# EAGLE board UCirKitBreadboardTop (EAGLE 7.3.0), part 1 of 2
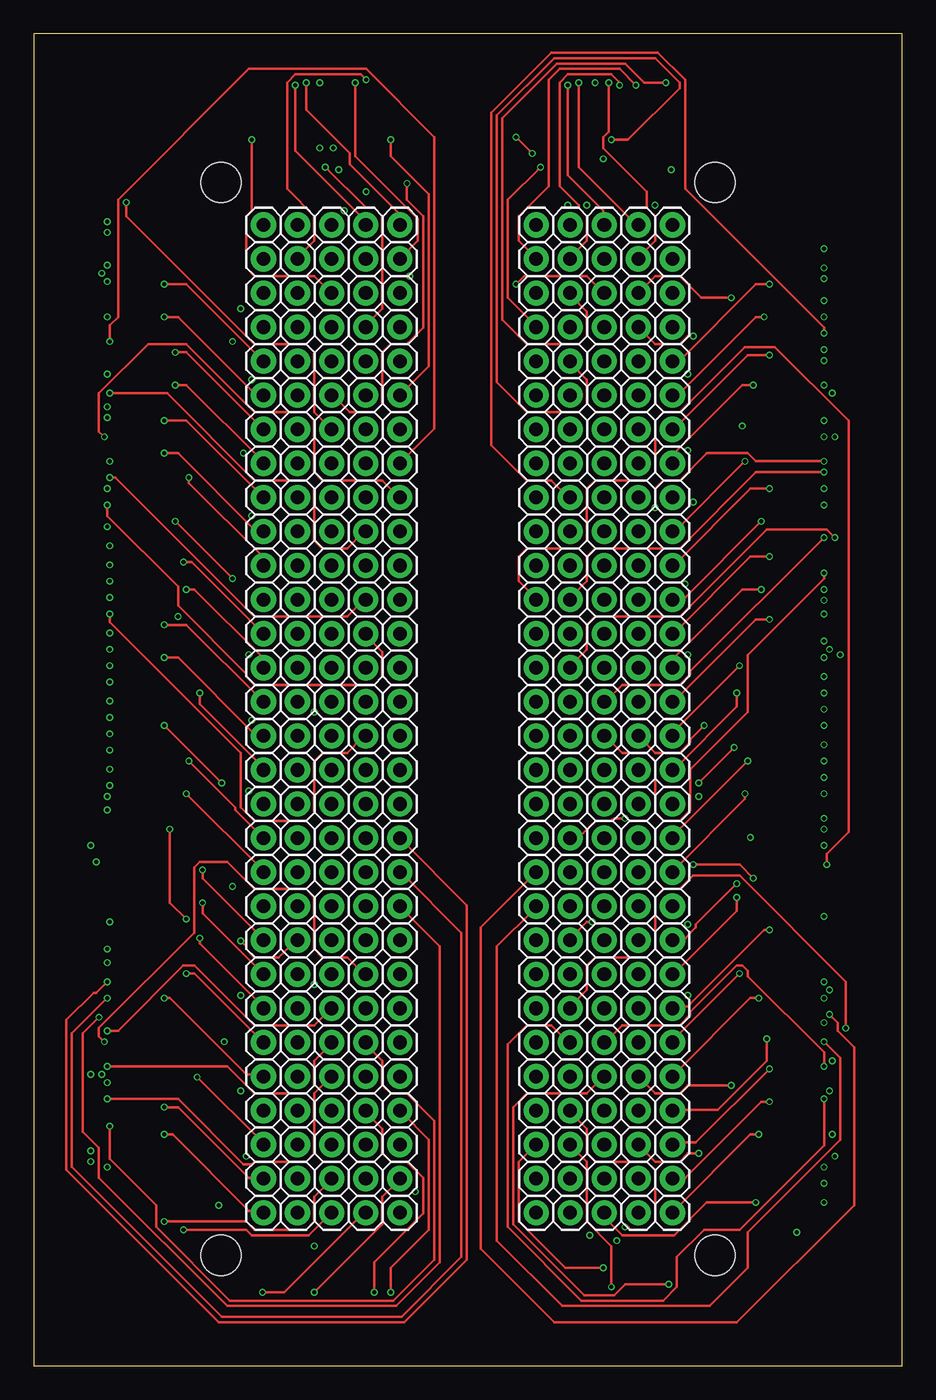
[diagram p0: board, top side]
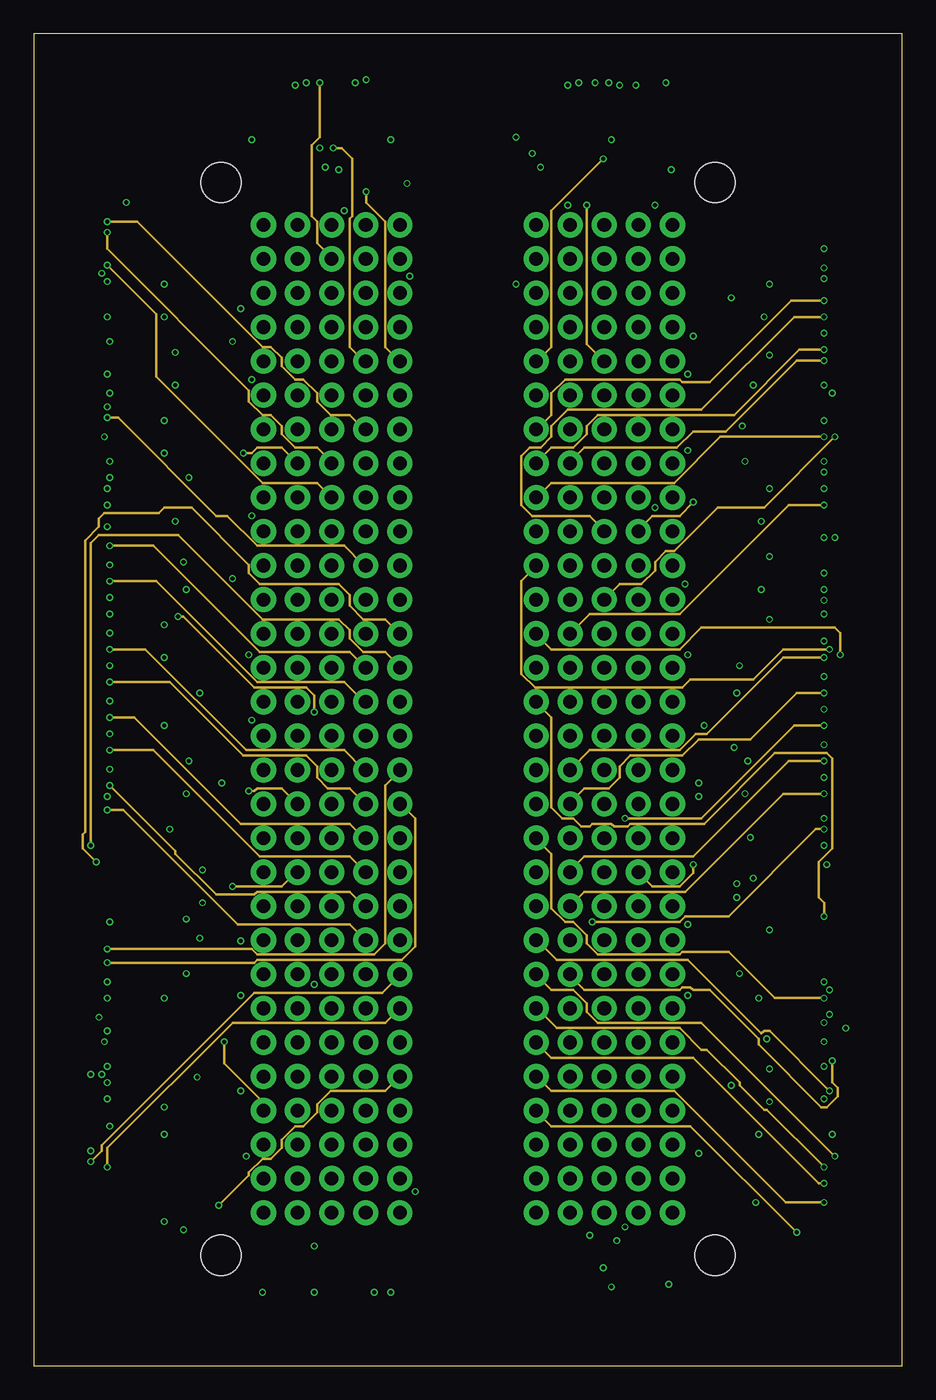
[diagram p1: board, inner layer Route2]
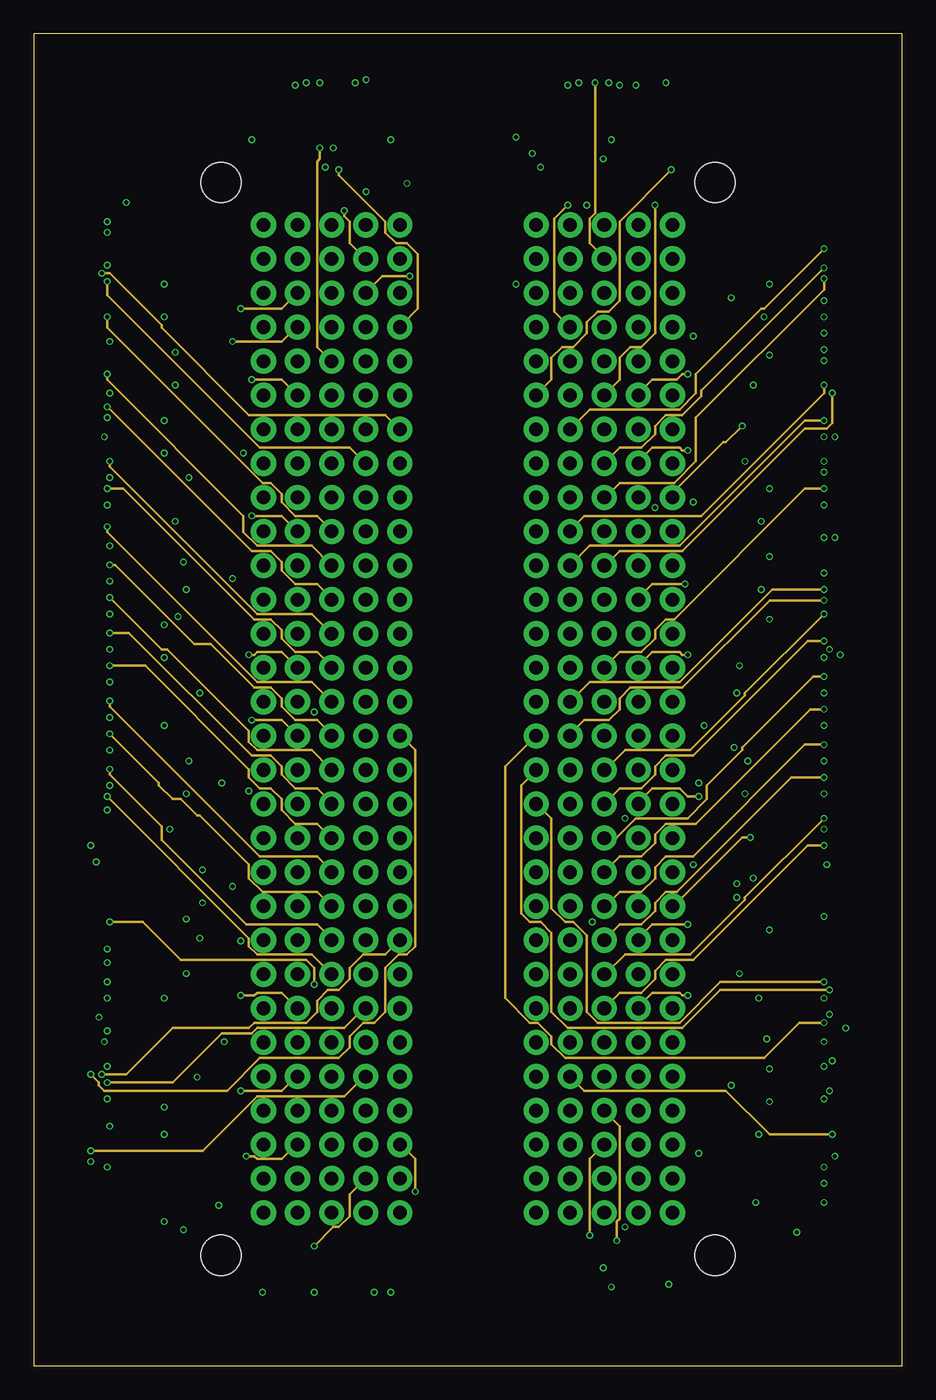
[diagram p2: board, inner layer Route15]
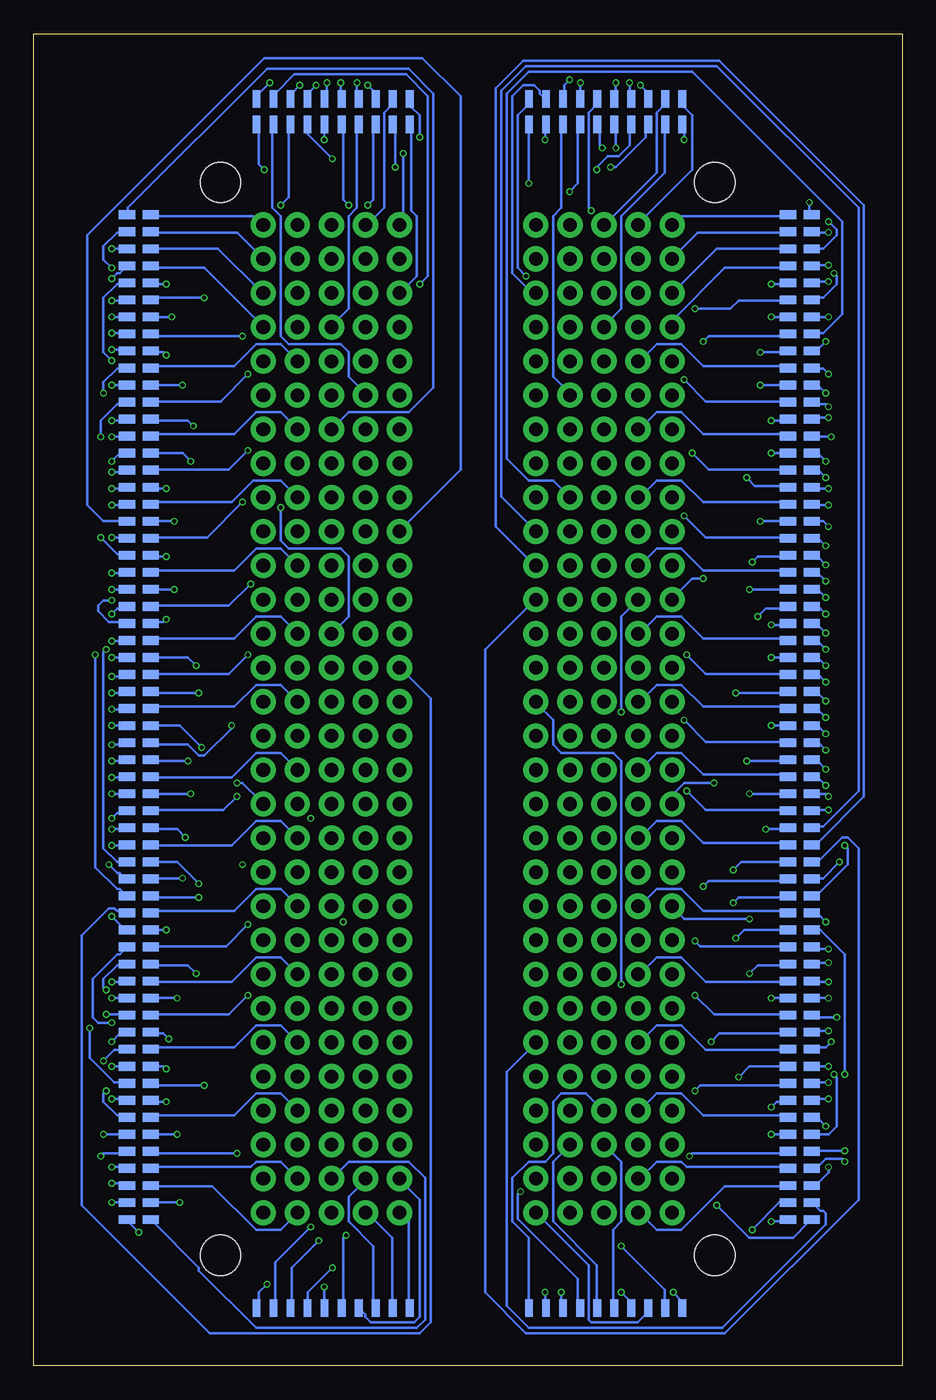
[diagram p3: board, bottom side, seen from below]

Size 64.75 x 99.36 mm. Coordinates in mm from the lower left corner, seen from the top.
Outline: 0,0 64.75,0 64.75,99.36 0,99.36 0,0
Copper layers (1*2*15*16): Top 0.035mm / dielectric 0.48mm / Route2 0.035mm / dielectric 0.48mm / Route15 0.035mm / dielectric 0.48mm / Bottom 0.035mm
Design rules "SeeedStudio_4layer_DRU_no_angle_20140221 *": minimum track width 8mil, minimum drill 12mil, track to track 8mil, track to pad 8mil, pad to pad 8mil, via to via 8mil, smd to smd 0mil, copper to edge 10mil, drill to drill 8mil, minimum pad ring 6mil, minimum via ring 4mil, stop-mask expansion 4mil, vias tented up to drill 100mil, thermal gap 10mil
Holes 3 mm at 13.97,88.27 50.8,88.27 13.97,8.26 50.8,8.26

## Footprints (pad centres in the part's own frame; a part is rotated, then mirrored left to right if it is on the bottom)
1X01_WITHOUT_TEXT = drill 1.016 pad 1.88: 1 0,0
1X01_SMD_1.27X0.635MM_NO_SILK = smd 1.27 x 0.635: P$2 0,0

## Placement (x,y rotation side)
JP1  [1X01_WITHOUT_TEXT]  17.14,85.09 0 top
JP2  [1X01_WITHOUT_TEXT]  19.68,85.09 0 top
JP3  [1X01_WITHOUT_TEXT]  22.23,85.09 0 top
JP4  [1X01_WITHOUT_TEXT]  24.77,85.09 0 top
JP5  [1X01_WITHOUT_TEXT]  27.3,85.09 0 top
JP6  [1X01_WITHOUT_TEXT]  37.47,85.09 0 top
JP7  [1X01_WITHOUT_TEXT]  40.01,85.09 0 top
JP8  [1X01_WITHOUT_TEXT]  42.55,85.09 0 top
JP9  [1X01_WITHOUT_TEXT]  45.09,85.09 0 top
JP10  [1X01_WITHOUT_TEXT]  47.62,85.09 0 top
JP11  [1X01_WITHOUT_TEXT]  17.14,82.55 0 top
JP12  [1X01_WITHOUT_TEXT]  19.68,82.55 0 top
JP13  [1X01_WITHOUT_TEXT]  22.23,82.55 0 top
JP14  [1X01_WITHOUT_TEXT]  24.77,82.55 0 top
JP15  [1X01_WITHOUT_TEXT]  27.3,82.55 0 top
JP16  [1X01_WITHOUT_TEXT]  37.47,82.55 0 top
JP17  [1X01_WITHOUT_TEXT]  40.01,82.55 0 top
JP18  [1X01_WITHOUT_TEXT]  42.55,82.55 0 top
JP19  [1X01_WITHOUT_TEXT]  45.09,82.55 0 top
JP20  [1X01_WITHOUT_TEXT]  47.62,82.55 0 top
JP21  [1X01_WITHOUT_TEXT]  17.14,80.01 0 top
JP22  [1X01_WITHOUT_TEXT]  19.68,80.01 0 top
JP23  [1X01_WITHOUT_TEXT]  22.23,80.01 0 top
JP24  [1X01_WITHOUT_TEXT]  24.77,80.01 0 top
JP25  [1X01_WITHOUT_TEXT]  27.3,80.01 0 top
JP26  [1X01_WITHOUT_TEXT]  37.47,80.01 0 top
JP27  [1X01_WITHOUT_TEXT]  40.01,80.01 0 top
JP28  [1X01_WITHOUT_TEXT]  42.55,80.01 0 top
JP29  [1X01_WITHOUT_TEXT]  45.09,80.01 0 top
JP30  [1X01_WITHOUT_TEXT]  47.62,80.01 0 top
JP31  [1X01_WITHOUT_TEXT]  17.14,77.47 0 top
JP32  [1X01_WITHOUT_TEXT]  19.68,77.47 0 top
JP33  [1X01_WITHOUT_TEXT]  22.23,77.47 0 top
JP34  [1X01_WITHOUT_TEXT]  24.77,77.47 0 top
JP35  [1X01_WITHOUT_TEXT]  27.3,77.47 0 top
JP36  [1X01_WITHOUT_TEXT]  37.47,77.47 0 top
JP37  [1X01_WITHOUT_TEXT]  40.01,77.47 0 top
JP38  [1X01_WITHOUT_TEXT]  42.55,77.47 0 top
JP39  [1X01_WITHOUT_TEXT]  45.09,77.47 0 top
JP40  [1X01_WITHOUT_TEXT]  47.62,77.47 0 top
JP41  [1X01_WITHOUT_TEXT]  17.14,74.93 0 top
JP42  [1X01_WITHOUT_TEXT]  19.68,74.93 0 top
JP43  [1X01_WITHOUT_TEXT]  22.23,74.93 0 top
JP44  [1X01_WITHOUT_TEXT]  24.77,74.93 0 top
JP45  [1X01_WITHOUT_TEXT]  27.3,74.93 0 top
JP46  [1X01_WITHOUT_TEXT]  37.47,74.93 0 top
JP47  [1X01_WITHOUT_TEXT]  40.01,74.93 0 top
JP48  [1X01_WITHOUT_TEXT]  42.55,74.93 0 top
JP49  [1X01_WITHOUT_TEXT]  45.09,74.93 0 top
JP50  [1X01_WITHOUT_TEXT]  47.62,74.93 0 top
JP51  [1X01_WITHOUT_TEXT]  17.14,72.39 0 top
JP52  [1X01_WITHOUT_TEXT]  19.68,72.39 0 top
JP53  [1X01_WITHOUT_TEXT]  22.23,72.39 0 top
JP54  [1X01_WITHOUT_TEXT]  24.77,72.39 0 top
JP55  [1X01_WITHOUT_TEXT]  27.3,72.39 0 top
JP56  [1X01_WITHOUT_TEXT]  37.47,72.39 0 top
JP57  [1X01_WITHOUT_TEXT]  40.01,72.39 0 top
JP58  [1X01_WITHOUT_TEXT]  42.55,72.39 0 top
JP59  [1X01_WITHOUT_TEXT]  45.09,72.39 0 top
JP60  [1X01_WITHOUT_TEXT]  47.62,72.39 0 top
JP61  [1X01_WITHOUT_TEXT]  17.14,69.85 0 top
JP62  [1X01_WITHOUT_TEXT]  19.68,69.85 0 top
JP63  [1X01_WITHOUT_TEXT]  22.23,69.85 0 top
JP64  [1X01_WITHOUT_TEXT]  24.77,69.85 0 top
JP65  [1X01_WITHOUT_TEXT]  27.3,69.85 0 top
JP66  [1X01_WITHOUT_TEXT]  37.47,69.85 0 top
JP67  [1X01_WITHOUT_TEXT]  40.01,69.85 0 top
JP68  [1X01_WITHOUT_TEXT]  42.55,69.85 0 top
JP69  [1X01_WITHOUT_TEXT]  45.09,69.85 0 top
JP70  [1X01_WITHOUT_TEXT]  47.62,69.85 0 top
JP71  [1X01_WITHOUT_TEXT]  17.14,67.31 0 top
JP72  [1X01_WITHOUT_TEXT]  19.68,67.31 0 top
JP73  [1X01_WITHOUT_TEXT]  22.23,67.31 0 top
JP74  [1X01_WITHOUT_TEXT]  24.77,67.31 0 top
JP75  [1X01_WITHOUT_TEXT]  27.3,67.31 0 top
JP76  [1X01_WITHOUT_TEXT]  37.47,67.31 0 top
JP77  [1X01_WITHOUT_TEXT]  40.01,67.31 0 top
JP78  [1X01_WITHOUT_TEXT]  42.55,67.31 0 top
JP79  [1X01_WITHOUT_TEXT]  45.09,67.31 0 top
JP80  [1X01_WITHOUT_TEXT]  47.62,67.31 0 top
JP81  [1X01_WITHOUT_TEXT]  17.14,64.77 0 top
JP82  [1X01_WITHOUT_TEXT]  19.68,64.77 0 top
JP83  [1X01_WITHOUT_TEXT]  22.23,64.77 0 top
JP84  [1X01_WITHOUT_TEXT]  24.77,64.77 0 top
JP85  [1X01_WITHOUT_TEXT]  27.3,64.77 0 top
JP86  [1X01_WITHOUT_TEXT]  37.47,64.77 0 top
JP87  [1X01_WITHOUT_TEXT]  40.01,64.77 0 top
JP88  [1X01_WITHOUT_TEXT]  42.55,64.77 0 top
JP89  [1X01_WITHOUT_TEXT]  45.09,64.77 0 top
JP90  [1X01_WITHOUT_TEXT]  47.62,64.77 0 top
JP91  [1X01_WITHOUT_TEXT]  17.14,62.23 0 top
JP92  [1X01_WITHOUT_TEXT]  19.68,62.23 0 top
JP93  [1X01_WITHOUT_TEXT]  22.23,62.23 0 top
JP94  [1X01_WITHOUT_TEXT]  24.77,62.23 0 top
JP95  [1X01_WITHOUT_TEXT]  27.3,62.23 0 top
JP96  [1X01_WITHOUT_TEXT]  37.47,62.23 0 top
JP97  [1X01_WITHOUT_TEXT]  40.01,62.23 0 top
JP98  [1X01_WITHOUT_TEXT]  42.55,62.23 0 top
JP99  [1X01_WITHOUT_TEXT]  45.09,62.23 0 top
JP100  [1X01_WITHOUT_TEXT]  47.62,62.23 0 top
JP101  [1X01_WITHOUT_TEXT]  17.14,59.69 0 top
JP102  [1X01_WITHOUT_TEXT]  19.68,59.69 0 top
JP103  [1X01_WITHOUT_TEXT]  22.23,59.69 0 top
JP104  [1X01_WITHOUT_TEXT]  24.77,59.69 0 top
JP105  [1X01_WITHOUT_TEXT]  27.3,59.69 0 top
JP106  [1X01_WITHOUT_TEXT]  37.47,59.69 0 top
JP107  [1X01_WITHOUT_TEXT]  40.01,59.69 0 top
JP108  [1X01_WITHOUT_TEXT]  42.55,59.69 0 top
JP109  [1X01_WITHOUT_TEXT]  45.09,59.69 0 top
JP110  [1X01_WITHOUT_TEXT]  47.62,59.69 0 top
JP111  [1X01_WITHOUT_TEXT]  17.14,57.15 0 top
JP112  [1X01_WITHOUT_TEXT]  19.68,57.15 0 top
JP113  [1X01_WITHOUT_TEXT]  22.23,57.15 0 top
JP114  [1X01_WITHOUT_TEXT]  24.77,57.15 0 top
JP115  [1X01_WITHOUT_TEXT]  27.3,57.15 0 top
JP116  [1X01_WITHOUT_TEXT]  37.47,57.15 0 top
JP117  [1X01_WITHOUT_TEXT]  40.01,57.15 0 top
JP118  [1X01_WITHOUT_TEXT]  42.55,57.15 0 top
JP119  [1X01_WITHOUT_TEXT]  45.09,57.15 0 top
JP120  [1X01_WITHOUT_TEXT]  47.62,57.15 0 top
JP121  [1X01_WITHOUT_TEXT]  17.14,54.61 0 top
JP122  [1X01_WITHOUT_TEXT]  19.68,54.61 0 top
JP123  [1X01_WITHOUT_TEXT]  22.23,54.61 0 top
JP124  [1X01_WITHOUT_TEXT]  24.77,54.61 0 top
JP125  [1X01_WITHOUT_TEXT]  27.3,54.61 0 top
JP126  [1X01_WITHOUT_TEXT]  37.47,54.61 0 top
JP127  [1X01_WITHOUT_TEXT]  40.01,54.61 0 top
JP128  [1X01_WITHOUT_TEXT]  42.55,54.61 0 top
JP129  [1X01_WITHOUT_TEXT]  45.09,54.61 0 top
JP130  [1X01_WITHOUT_TEXT]  47.62,54.61 0 top
JP131  [1X01_WITHOUT_TEXT]  17.14,52.07 0 top
JP132  [1X01_WITHOUT_TEXT]  19.68,52.07 0 top
JP133  [1X01_WITHOUT_TEXT]  22.23,52.07 0 top
JP134  [1X01_WITHOUT_TEXT]  24.77,52.07 0 top
JP135  [1X01_WITHOUT_TEXT]  27.3,52.07 0 top
JP136  [1X01_WITHOUT_TEXT]  37.47,52.07 0 top
JP137  [1X01_WITHOUT_TEXT]  40.01,52.07 0 top
JP138  [1X01_WITHOUT_TEXT]  42.55,52.07 0 top
JP139  [1X01_WITHOUT_TEXT]  45.09,52.07 0 top
JP140  [1X01_WITHOUT_TEXT]  47.62,52.07 0 top
JP141  [1X01_WITHOUT_TEXT]  17.14,49.53 0 top
JP142  [1X01_WITHOUT_TEXT]  19.68,49.53 0 top
JP143  [1X01_WITHOUT_TEXT]  22.23,49.53 0 top
JP144  [1X01_WITHOUT_TEXT]  24.77,49.53 0 top
JP145  [1X01_WITHOUT_TEXT]  27.3,49.53 0 top
JP146  [1X01_WITHOUT_TEXT]  37.47,49.53 0 top
JP147  [1X01_WITHOUT_TEXT]  40.01,49.53 0 top
JP148  [1X01_WITHOUT_TEXT]  42.55,49.53 0 top
JP149  [1X01_WITHOUT_TEXT]  45.09,49.53 0 top
JP150  [1X01_WITHOUT_TEXT]  47.62,49.53 0 top
JP151  [1X01_WITHOUT_TEXT]  17.14,46.99 0 top
JP152  [1X01_WITHOUT_TEXT]  19.68,46.99 0 top
JP153  [1X01_WITHOUT_TEXT]  22.23,46.99 0 top
JP154  [1X01_WITHOUT_TEXT]  24.77,46.99 0 top
JP155  [1X01_WITHOUT_TEXT]  27.3,46.99 0 top
JP156  [1X01_WITHOUT_TEXT]  37.47,46.99 0 top
JP157  [1X01_WITHOUT_TEXT]  40.01,46.99 0 top
JP158  [1X01_WITHOUT_TEXT]  42.55,46.99 0 top
JP159  [1X01_WITHOUT_TEXT]  45.09,46.99 0 top
JP160  [1X01_WITHOUT_TEXT]  47.62,46.99 0 top
JP161  [1X01_WITHOUT_TEXT]  17.14,44.45 0 top
JP162  [1X01_WITHOUT_TEXT]  19.68,44.45 0 top
JP163  [1X01_WITHOUT_TEXT]  22.23,44.45 0 top
JP164  [1X01_WITHOUT_TEXT]  24.77,44.45 0 top
JP165  [1X01_WITHOUT_TEXT]  27.3,44.45 0 top
JP166  [1X01_WITHOUT_TEXT]  37.47,44.45 0 top
JP167  [1X01_WITHOUT_TEXT]  40.01,44.45 0 top
JP168  [1X01_WITHOUT_TEXT]  42.55,44.45 0 top
JP169  [1X01_WITHOUT_TEXT]  45.09,44.45 0 top
JP170  [1X01_WITHOUT_TEXT]  47.62,44.45 0 top
JP171  [1X01_WITHOUT_TEXT]  17.14,41.91 0 top
JP172  [1X01_WITHOUT_TEXT]  19.68,41.91 0 top
JP173  [1X01_WITHOUT_TEXT]  22.23,41.91 0 top
JP174  [1X01_WITHOUT_TEXT]  24.77,41.91 0 top
JP175  [1X01_WITHOUT_TEXT]  27.3,41.91 0 top
JP176  [1X01_WITHOUT_TEXT]  37.47,41.91 0 top
JP177  [1X01_WITHOUT_TEXT]  40.01,41.91 0 top
JP178  [1X01_WITHOUT_TEXT]  42.55,41.91 0 top
JP179  [1X01_WITHOUT_TEXT]  45.09,41.91 0 top
JP180  [1X01_WITHOUT_TEXT]  47.62,41.91 0 top
JP181  [1X01_WITHOUT_TEXT]  17.14,39.37 0 top
JP182  [1X01_WITHOUT_TEXT]  19.68,39.37 0 top
JP183  [1X01_WITHOUT_TEXT]  22.23,39.37 0 top
JP184  [1X01_WITHOUT_TEXT]  24.77,39.37 0 top
JP185  [1X01_WITHOUT_TEXT]  27.3,39.37 0 top
JP186  [1X01_WITHOUT_TEXT]  37.47,39.37 0 top
JP187  [1X01_WITHOUT_TEXT]  40.01,39.37 0 top
JP188  [1X01_WITHOUT_TEXT]  42.55,39.37 0 top
JP189  [1X01_WITHOUT_TEXT]  45.09,39.37 0 top
JP190  [1X01_WITHOUT_TEXT]  47.62,39.37 0 top
JP191  [1X01_WITHOUT_TEXT]  17.14,36.83 0 top
JP192  [1X01_WITHOUT_TEXT]  19.68,36.83 0 top
JP193  [1X01_WITHOUT_TEXT]  22.23,36.83 0 top
JP194  [1X01_WITHOUT_TEXT]  24.77,36.83 0 top
JP195  [1X01_WITHOUT_TEXT]  27.3,36.83 0 top
JP196  [1X01_WITHOUT_TEXT]  37.47,36.83 0 top
JP197  [1X01_WITHOUT_TEXT]  40.01,36.83 0 top
JP198  [1X01_WITHOUT_TEXT]  42.55,36.83 0 top
JP199  [1X01_WITHOUT_TEXT]  45.09,36.83 0 top
JP200  [1X01_WITHOUT_TEXT]  47.62,36.83 0 top
JP201  [1X01_WITHOUT_TEXT]  17.14,34.29 0 top
JP202  [1X01_WITHOUT_TEXT]  19.68,34.29 0 top
JP203  [1X01_WITHOUT_TEXT]  22.23,34.29 0 top
JP204  [1X01_WITHOUT_TEXT]  24.77,34.29 0 top
JP205  [1X01_WITHOUT_TEXT]  27.3,34.29 0 top
JP206  [1X01_WITHOUT_TEXT]  37.47,34.29 0 top
JP207  [1X01_WITHOUT_TEXT]  40.01,34.29 0 top
JP208  [1X01_WITHOUT_TEXT]  42.55,34.29 0 top
JP209  [1X01_WITHOUT_TEXT]  45.09,34.29 0 top
JP210  [1X01_WITHOUT_TEXT]  47.62,34.29 0 top
JP211  [1X01_WITHOUT_TEXT]  17.14,31.75 0 top
JP212  [1X01_WITHOUT_TEXT]  19.68,31.75 0 top
JP213  [1X01_WITHOUT_TEXT]  22.23,31.75 0 top
JP214  [1X01_WITHOUT_TEXT]  24.77,31.75 0 top
JP215  [1X01_WITHOUT_TEXT]  27.3,31.75 0 top
JP216  [1X01_WITHOUT_TEXT]  37.47,31.75 0 top
JP217  [1X01_WITHOUT_TEXT]  40.01,31.75 0 top
JP218  [1X01_WITHOUT_TEXT]  42.55,31.75 0 top
JP219  [1X01_WITHOUT_TEXT]  45.09,31.75 0 top
JP220  [1X01_WITHOUT_TEXT]  47.62,31.75 0 top
JP221  [1X01_WITHOUT_TEXT]  17.14,29.21 0 top
JP222  [1X01_WITHOUT_TEXT]  19.68,29.21 0 top
JP223  [1X01_WITHOUT_TEXT]  22.23,29.21 0 top
JP224  [1X01_WITHOUT_TEXT]  24.77,29.21 0 top
JP225  [1X01_WITHOUT_TEXT]  27.3,29.21 0 top
JP226  [1X01_WITHOUT_TEXT]  37.47,29.21 0 top
JP227  [1X01_WITHOUT_TEXT]  40.01,29.21 0 top
JP228  [1X01_WITHOUT_TEXT]  42.55,29.21 0 top
JP229  [1X01_WITHOUT_TEXT]  45.09,29.21 0 top
JP230  [1X01_WITHOUT_TEXT]  47.62,29.21 0 top
JP231  [1X01_WITHOUT_TEXT]  17.14,26.67 0 top
JP232  [1X01_WITHOUT_TEXT]  19.68,26.67 0 top
JP233  [1X01_WITHOUT_TEXT]  22.23,26.67 0 top
JP234  [1X01_WITHOUT_TEXT]  24.77,26.67 0 top
JP235  [1X01_WITHOUT_TEXT]  27.3,26.67 0 top
JP236  [1X01_WITHOUT_TEXT]  37.47,26.67 0 top
JP237  [1X01_WITHOUT_TEXT]  40.01,26.67 0 top
JP238  [1X01_WITHOUT_TEXT]  42.55,26.67 0 top
JP239  [1X01_WITHOUT_TEXT]  45.09,26.67 0 top
JP240  [1X01_WITHOUT_TEXT]  47.62,26.67 0 top
JP241  [1X01_WITHOUT_TEXT]  17.14,24.13 0 top
JP242  [1X01_WITHOUT_TEXT]  19.68,24.13 0 top
JP243  [1X01_WITHOUT_TEXT]  22.23,24.13 0 top
JP244  [1X01_WITHOUT_TEXT]  24.77,24.13 0 top
JP245  [1X01_WITHOUT_TEXT]  27.3,24.13 0 top
JP246  [1X01_WITHOUT_TEXT]  37.47,24.13 0 top
JP247  [1X01_WITHOUT_TEXT]  40.01,24.13 0 top
JP248  [1X01_WITHOUT_TEXT]  42.55,24.13 0 top
JP249  [1X01_WITHOUT_TEXT]  45.09,24.13 0 top
JP250  [1X01_WITHOUT_TEXT]  47.62,24.13 0 top
JP251  [1X01_WITHOUT_TEXT]  17.14,21.59 0 top
JP252  [1X01_WITHOUT_TEXT]  19.68,21.59 0 top
JP253  [1X01_WITHOUT_TEXT]  22.23,21.59 0 top
JP254  [1X01_WITHOUT_TEXT]  24.77,21.59 0 top
JP255  [1X01_WITHOUT_TEXT]  27.3,21.59 0 top
JP256  [1X01_WITHOUT_TEXT]  37.47,21.59 0 top
JP257  [1X01_WITHOUT_TEXT]  40.01,21.59 0 top
JP258  [1X01_WITHOUT_TEXT]  42.55,21.59 0 top
JP259  [1X01_WITHOUT_TEXT]  45.09,21.59 0 top
JP260  [1X01_WITHOUT_TEXT]  47.62,21.59 0 top
JP261  [1X01_WITHOUT_TEXT]  17.14,19.05 0 top
JP262  [1X01_WITHOUT_TEXT]  19.68,19.05 0 top
JP263  [1X01_WITHOUT_TEXT]  22.23,19.05 0 top
JP264  [1X01_WITHOUT_TEXT]  24.77,19.05 0 top
JP265  [1X01_WITHOUT_TEXT]  27.3,19.05 0 top
JP266  [1X01_WITHOUT_TEXT]  37.47,19.05 0 top
JP267  [1X01_WITHOUT_TEXT]  40.01,19.05 0 top
JP268  [1X01_WITHOUT_TEXT]  42.55,19.05 0 top
JP269  [1X01_WITHOUT_TEXT]  45.09,19.05 0 top
JP270  [1X01_WITHOUT_TEXT]  47.62,19.05 0 top
JP271  [1X01_WITHOUT_TEXT]  17.14,16.51 0 top
JP272  [1X01_WITHOUT_TEXT]  19.68,16.51 0 top
JP273  [1X01_WITHOUT_TEXT]  22.23,16.51 0 top
JP274  [1X01_WITHOUT_TEXT]  24.77,16.51 0 top
JP275  [1X01_WITHOUT_TEXT]  27.3,16.51 0 top
JP276  [1X01_WITHOUT_TEXT]  37.47,16.51 0 top
JP277  [1X01_WITHOUT_TEXT]  40.01,16.51 0 top
JP278  [1X01_WITHOUT_TEXT]  42.55,16.51 0 top
JP279  [1X01_WITHOUT_TEXT]  45.09,16.51 0 top
JP280  [1X01_WITHOUT_TEXT]  47.62,16.51 0 top
JP281  [1X01_WITHOUT_TEXT]  17.14,13.97 0 top
JP282  [1X01_WITHOUT_TEXT]  19.68,13.97 0 top
JP283  [1X01_WITHOUT_TEXT]  22.23,13.97 0 top
JP284  [1X01_WITHOUT_TEXT]  24.77,13.97 0 top
JP285  [1X01_WITHOUT_TEXT]  27.3,13.97 0 top
JP286  [1X01_WITHOUT_TEXT]  37.47,13.97 0 top
JP287  [1X01_WITHOUT_TEXT]  40.01,13.97 0 top
JP288  [1X01_WITHOUT_TEXT]  42.55,13.97 0 top
JP289  [1X01_WITHOUT_TEXT]  45.09,13.97 0 top
JP290  [1X01_WITHOUT_TEXT]  47.62,13.97 0 top
JP291  [1X01_WITHOUT_TEXT]  17.14,11.43 0 top
JP292  [1X01_WITHOUT_TEXT]  19.68,11.43 0 top
JP293  [1X01_WITHOUT_TEXT]  22.23,11.43 0 top
JP294  [1X01_WITHOUT_TEXT]  24.77,11.43 0 top
JP295  [1X01_WITHOUT_TEXT]  27.3,11.43 0 top
JP296  [1X01_WITHOUT_TEXT]  37.47,11.43 0 top
JP297  [1X01_WITHOUT_TEXT]  40.01,11.43 0 top
JP298  [1X01_WITHOUT_TEXT]  42.55,11.43 0 top
JP299  [1X01_WITHOUT_TEXT]  45.09,11.43 0 top
JP300  [1X01_WITHOUT_TEXT]  47.62,11.43 0 top
JP901  [1X01_SMD_1.27X0.635MM_NO_SILK]  6.73,85.85 0 bottom
JP902  [1X01_SMD_1.27X0.635MM_NO_SILK]  6.73,84.58 0 bottom
JP903  [1X01_SMD_1.27X0.635MM_NO_SILK]  6.73,83.31 0 bottom
JP904  [1X01_SMD_1.27X0.635MM_NO_SILK]  6.73,82.04 0 bottom
JP905  [1X01_SMD_1.27X0.635MM_NO_SILK]  6.73,80.77 0 bottom
JP906  [1X01_SMD_1.27X0.635MM_NO_SILK]  6.73,79.5 0 bottom
JP907  [1X01_SMD_1.27X0.635MM_NO_SILK]  6.73,78.23 0 bottom
JP908  [1X01_SMD_1.27X0.635MM_NO_SILK]  6.73,76.96 0 bottom
JP909  [1X01_SMD_1.27X0.635MM_NO_SILK]  6.73,75.69 0 bottom
JP910  [1X01_SMD_1.27X0.635MM_NO_SILK]  6.73,74.42 0 bottom
JP911  [1X01_SMD_1.27X0.635MM_NO_SILK]  6.73,73.15 0 bottom
JP912  [1X01_SMD_1.27X0.635MM_NO_SILK]  6.73,71.88 0 bottom
JP913  [1X01_SMD_1.27X0.635MM_NO_SILK]  6.73,70.61 0 bottom
JP914  [1X01_SMD_1.27X0.635MM_NO_SILK]  6.73,69.34 0 bottom
JP915  [1X01_SMD_1.27X0.635MM_NO_SILK]  6.73,68.07 0 bottom
JP916  [1X01_SMD_1.27X0.635MM_NO_SILK]  6.73,66.8 0 bottom
JP917  [1X01_SMD_1.27X0.635MM_NO_SILK]  6.73,65.53 0 bottom
JP918  [1X01_SMD_1.27X0.635MM_NO_SILK]  6.73,64.26 0 bottom
JP919  [1X01_SMD_1.27X0.635MM_NO_SILK]  6.73,62.99 0 bottom
JP920  [1X01_SMD_1.27X0.635MM_NO_SILK]  6.73,61.72 0 bottom
JP921  [1X01_SMD_1.27X0.635MM_NO_SILK]  6.73,60.45 0 bottom
JP922  [1X01_SMD_1.27X0.635MM_NO_SILK]  6.73,59.18 0 bottom
JP923  [1X01_SMD_1.27X0.635MM_NO_SILK]  6.73,57.91 0 bottom
JP924  [1X01_SMD_1.27X0.635MM_NO_SILK]  6.73,56.64 0 bottom
JP925  [1X01_SMD_1.27X0.635MM_NO_SILK]  6.73,55.37 0 bottom
JP926  [1X01_SMD_1.27X0.635MM_NO_SILK]  6.73,54.1 0 bottom
JP927  [1X01_SMD_1.27X0.635MM_NO_SILK]  6.73,52.83 0 bottom
JP928  [1X01_SMD_1.27X0.635MM_NO_SILK]  6.73,51.56 0 bottom
JP929  [1X01_SMD_1.27X0.635MM_NO_SILK]  6.73,50.29 0 bottom
JP930  [1X01_SMD_1.27X0.635MM_NO_SILK]  6.73,49.02 0 bottom
JP931  [1X01_SMD_1.27X0.635MM_NO_SILK]  6.73,47.75 0 bottom
JP932  [1X01_SMD_1.27X0.635MM_NO_SILK]  6.73,46.48 0 bottom
JP933  [1X01_SMD_1.27X0.635MM_NO_SILK]  6.73,45.21 0 bottom
JP934  [1X01_SMD_1.27X0.635MM_NO_SILK]  6.73,43.94 0 bottom
JP935  [1X01_SMD_1.27X0.635MM_NO_SILK]  6.73,42.67 0 bottom
JP936  [1X01_SMD_1.27X0.635MM_NO_SILK]  6.73,41.4 0 bottom
JP937  [1X01_SMD_1.27X0.635MM_NO_SILK]  6.73,24.89 0 bottom
JP938  [1X01_SMD_1.27X0.635MM_NO_SILK]  6.73,23.62 0 bottom
JP939  [1X01_SMD_1.27X0.635MM_NO_SILK]  6.73,22.35 0 bottom
JP940  [1X01_SMD_1.27X0.635MM_NO_SILK]  6.73,21.08 0 bottom
JP941  [1X01_SMD_1.27X0.635MM_NO_SILK]  6.73,19.81 0 bottom
JP942  [1X01_SMD_1.27X0.635MM_NO_SILK]  6.73,18.54 0 bottom
JP943  [1X01_SMD_1.27X0.635MM_NO_SILK]  6.73,17.27 0 bottom
JP944  [1X01_SMD_1.27X0.635MM_NO_SILK]  6.73,16 0 bottom
JP945  [1X01_SMD_1.27X0.635MM_NO_SILK]  6.73,14.73 0 bottom
JP946  [1X01_SMD_1.27X0.635MM_NO_SILK]  6.73,13.46 0 bottom
JP947  [1X01_SMD_1.27X0.635MM_NO_SILK]  6.73,12.19 0 bottom
JP948  [1X01_SMD_1.27X0.635MM_NO_SILK]  6.73,10.92 0 bottom
JP949  [1X01_SMD_1.27X0.635MM_NO_SILK]  6.73,26.16 180 bottom
JP950  [1X01_SMD_1.27X0.635MM_NO_SILK]  6.73,27.43 180 bottom
JP951  [1X01_SMD_1.27X0.635MM_NO_SILK]  6.73,28.7 180 bottom
JP952  [1X01_SMD_1.27X0.635MM_NO_SILK]  6.73,29.97 180 bottom
JP953  [1X01_SMD_1.27X0.635MM_NO_SILK]  6.73,31.24 180 bottom
JP954  [1X01_SMD_1.27X0.635MM_NO_SILK]  6.73,32.51 180 bottom
JP955  [1X01_SMD_1.27X0.635MM_NO_SILK]  6.73,33.78 180 bottom
JP956  [1X01_SMD_1.27X0.635MM_NO_SILK]  6.73,35.05 180 bottom
JP957  [1X01_SMD_1.27X0.635MM_NO_SILK]  6.73,36.32 180 bottom
JP958  [1X01_SMD_1.27X0.635MM_NO_SILK]  6.73,37.59 180 bottom
JP959  [1X01_SMD_1.27X0.635MM_NO_SILK]  6.73,38.86 180 bottom
JP960  [1X01_SMD_1.27X0.635MM_NO_SILK]  6.73,40.13 180 bottom
JP961  [1X01_SMD_1.27X0.635MM_NO_SILK]  8.51,85.85 0 bottom
JP962  [1X01_SMD_1.27X0.635MM_NO_SILK]  8.51,84.58 0 bottom
JP963  [1X01_SMD_1.27X0.635MM_NO_SILK]  8.51,83.31 0 bottom
JP964  [1X01_SMD_1.27X0.635MM_NO_SILK]  8.51,82.04 0 bottom
JP965  [1X01_SMD_1.27X0.635MM_NO_SILK]  8.51,80.77 0 bottom
JP966  [1X01_SMD_1.27X0.635MM_NO_SILK]  8.51,79.5 0 bottom
JP967  [1X01_SMD_1.27X0.635MM_NO_SILK]  8.51,78.23 0 bottom
JP968  [1X01_SMD_1.27X0.635MM_NO_SILK]  8.51,76.96 0 bottom
JP969  [1X01_SMD_1.27X0.635MM_NO_SILK]  8.51,75.69 0 bottom
JP970  [1X01_SMD_1.27X0.635MM_NO_SILK]  8.51,74.42 0 bottom
JP971  [1X01_SMD_1.27X0.635MM_NO_SILK]  8.51,73.15 0 bottom
JP972  [1X01_SMD_1.27X0.635MM_NO_SILK]  8.51,71.88 0 bottom
JP973  [1X01_SMD_1.27X0.635MM_NO_SILK]  8.51,70.61 0 bottom
JP974  [1X01_SMD_1.27X0.635MM_NO_SILK]  8.51,69.34 0 bottom
JP975  [1X01_SMD_1.27X0.635MM_NO_SILK]  8.51,68.07 0 bottom
JP976  [1X01_SMD_1.27X0.635MM_NO_SILK]  8.51,66.8 0 bottom
JP977  [1X01_SMD_1.27X0.635MM_NO_SILK]  8.51,65.53 0 bottom
JP978  [1X01_SMD_1.27X0.635MM_NO_SILK]  8.51,64.26 0 bottom
JP979  [1X01_SMD_1.27X0.635MM_NO_SILK]  8.51,62.99 0 bottom
JP980  [1X01_SMD_1.27X0.635MM_NO_SILK]  8.51,61.72 0 bottom
JP981  [1X01_SMD_1.27X0.635MM_NO_SILK]  8.51,60.45 0 bottom
JP982  [1X01_SMD_1.27X0.635MM_NO_SILK]  8.51,59.18 0 bottom
JP983  [1X01_SMD_1.27X0.635MM_NO_SILK]  8.51,57.91 0 bottom
JP984  [1X01_SMD_1.27X0.635MM_NO_SILK]  8.51,56.64 0 bottom
JP985  [1X01_SMD_1.27X0.635MM_NO_SILK]  8.51,55.37 0 bottom
JP986  [1X01_SMD_1.27X0.635MM_NO_SILK]  8.51,54.1 0 bottom
JP987  [1X01_SMD_1.27X0.635MM_NO_SILK]  8.51,52.83 0 bottom
JP988  [1X01_SMD_1.27X0.635MM_NO_SILK]  8.51,51.56 0 bottom
JP989  [1X01_SMD_1.27X0.635MM_NO_SILK]  8.51,50.29 0 bottom
JP990  [1X01_SMD_1.27X0.635MM_NO_SILK]  8.51,49.02 0 bottom
JP991  [1X01_SMD_1.27X0.635MM_NO_SILK]  8.51,47.75 0 bottom
JP992  [1X01_SMD_1.27X0.635MM_NO_SILK]  8.51,46.48 0 bottom
JP993  [1X01_SMD_1.27X0.635MM_NO_SILK]  8.51,45.21 0 bottom
JP994  [1X01_SMD_1.27X0.635MM_NO_SILK]  8.51,43.94 0 bottom
JP995  [1X01_SMD_1.27X0.635MM_NO_SILK]  8.51,42.67 0 bottom
JP996  [1X01_SMD_1.27X0.635MM_NO_SILK]  8.51,41.4 0 bottom
JP997  [1X01_SMD_1.27X0.635MM_NO_SILK]  8.51,40.13 0 bottom
JP998  [1X01_SMD_1.27X0.635MM_NO_SILK]  8.51,38.86 0 bottom
JP999  [1X01_SMD_1.27X0.635MM_NO_SILK]  8.51,37.59 0 bottom
JP1000  [1X01_SMD_1.27X0.635MM_NO_SILK]  8.51,36.32 0 bottom
JP1001  [1X01_SMD_1.27X0.635MM_NO_SILK]  8.51,35.05 0 bottom
JP1002  [1X01_SMD_1.27X0.635MM_NO_SILK]  8.51,33.78 0 bottom
JP1003  [1X01_SMD_1.27X0.635MM_NO_SILK]  8.51,32.51 0 bottom
JP1004  [1X01_SMD_1.27X0.635MM_NO_SILK]  8.51,31.24 0 bottom
JP1005  [1X01_SMD_1.27X0.635MM_NO_SILK]  8.51,29.97 0 bottom
JP1006  [1X01_SMD_1.27X0.635MM_NO_SILK]  8.51,28.7 0 bottom
JP1007  [1X01_SMD_1.27X0.635MM_NO_SILK]  8.51,27.43 0 bottom
JP1008  [1X01_SMD_1.27X0.635MM_NO_SILK]  8.51,26.16 0 bottom
JP1009  [1X01_SMD_1.27X0.635MM_NO_SILK]  8.51,24.89 0 bottom
JP1010  [1X01_SMD_1.27X0.635MM_NO_SILK]  8.51,23.62 0 bottom
JP1011  [1X01_SMD_1.27X0.635MM_NO_SILK]  8.51,22.35 0 bottom
JP1012  [1X01_SMD_1.27X0.635MM_NO_SILK]  8.51,21.08 0 bottom
JP1013  [1X01_SMD_1.27X0.635MM_NO_SILK]  8.51,19.81 0 bottom
JP1014  [1X01_SMD_1.27X0.635MM_NO_SILK]  8.51,18.54 0 bottom
JP1015  [1X01_SMD_1.27X0.635MM_NO_SILK]  8.51,17.27 0 bottom
JP1016  [1X01_SMD_1.27X0.635MM_NO_SILK]  8.51,16 0 bottom
JP1017  [1X01_SMD_1.27X0.635MM_NO_SILK]  8.51,14.73 0 bottom
JP1018  [1X01_SMD_1.27X0.635MM_NO_SILK]  8.51,13.46 0 bottom
JP1019  [1X01_SMD_1.27X0.635MM_NO_SILK]  8.51,12.19 0 bottom
JP1020  [1X01_SMD_1.27X0.635MM_NO_SILK]  8.51,10.92 0 bottom
JP1021  [1X01_SMD_1.27X0.635MM_NO_SILK]  56.01,85.85 0 bottom
JP1022  [1X01_SMD_1.27X0.635MM_NO_SILK]  56.01,84.58 0 bottom
JP1023  [1X01_SMD_1.27X0.635MM_NO_SILK]  56.01,83.31 0 bottom
JP1024  [1X01_SMD_1.27X0.635MM_NO_SILK]  56.01,82.04 0 bottom
JP1025  [1X01_SMD_1.27X0.635MM_NO_SILK]  56.01,80.77 0 bottom
JP1026  [1X01_SMD_1.27X0.635MM_NO_SILK]  56.01,79.5 0 bottom
JP1027  [1X01_SMD_1.27X0.635MM_NO_SILK]  56.01,78.23 0 bottom
JP1028  [1X01_SMD_1.27X0.635MM_NO_SILK]  56.01,76.96 0 bottom
JP1029  [1X01_SMD_1.27X0.635MM_NO_SILK]  56.01,75.69 0 bottom
JP1030  [1X01_SMD_1.27X0.635MM_NO_SILK]  56.01,74.42 0 bottom
JP1031  [1X01_SMD_1.27X0.635MM_NO_SILK]  56.01,73.15 0 bottom
JP1032  [1X01_SMD_1.27X0.635MM_NO_SILK]  56.01,71.88 0 bottom
JP1033  [1X01_SMD_1.27X0.635MM_NO_SILK]  56.01,70.61 0 bottom
JP1034  [1X01_SMD_1.27X0.635MM_NO_SILK]  56.01,69.34 0 bottom
JP1035  [1X01_SMD_1.27X0.635MM_NO_SILK]  56.01,68.07 0 bottom
JP1036  [1X01_SMD_1.27X0.635MM_NO_SILK]  56.01,66.8 0 bottom
JP1037  [1X01_SMD_1.27X0.635MM_NO_SILK]  56.01,65.53 0 bottom
JP1038  [1X01_SMD_1.27X0.635MM_NO_SILK]  56.01,64.26 0 bottom
JP1039  [1X01_SMD_1.27X0.635MM_NO_SILK]  56.01,62.99 0 bottom
JP1040  [1X01_SMD_1.27X0.635MM_NO_SILK]  56.01,61.72 0 bottom
JP1041  [1X01_SMD_1.27X0.635MM_NO_SILK]  56.01,60.45 0 bottom
JP1042  [1X01_SMD_1.27X0.635MM_NO_SILK]  56.01,59.18 0 bottom
JP1043  [1X01_SMD_1.27X0.635MM_NO_SILK]  56.01,57.91 0 bottom
JP1044  [1X01_SMD_1.27X0.635MM_NO_SILK]  56.01,56.64 0 bottom
JP1045  [1X01_SMD_1.27X0.635MM_NO_SILK]  56.01,55.37 0 bottom
JP1046  [1X01_SMD_1.27X0.635MM_NO_SILK]  56.01,54.1 0 bottom
JP1047  [1X01_SMD_1.27X0.635MM_NO_SILK]  56.01,52.83 0 bottom
JP1048  [1X01_SMD_1.27X0.635MM_NO_SILK]  56.01,51.56 0 bottom
JP1049  [1X01_SMD_1.27X0.635MM_NO_SILK]  56.01,50.29 0 bottom
JP1050  [1X01_SMD_1.27X0.635MM_NO_SILK]  56.01,49.02 0 bottom
JP1051  [1X01_SMD_1.27X0.635MM_NO_SILK]  56.01,47.75 0 bottom
JP1052  [1X01_SMD_1.27X0.635MM_NO_SILK]  56.01,46.48 0 bottom
JP1053  [1X01_SMD_1.27X0.635MM_NO_SILK]  56.01,45.21 0 bottom
JP1054  [1X01_SMD_1.27X0.635MM_NO_SILK]  56.01,43.94 0 bottom
JP1055  [1X01_SMD_1.27X0.635MM_NO_SILK]  56.01,42.67 0 bottom
JP1056  [1X01_SMD_1.27X0.635MM_NO_SILK]  56.01,41.4 0 bottom
JP1057  [1X01_SMD_1.27X0.635MM_NO_SILK]  56.01,40.13 0 bottom
JP1058  [1X01_SMD_1.27X0.635MM_NO_SILK]  56.01,38.86 0 bottom
JP1059  [1X01_SMD_1.27X0.635MM_NO_SILK]  56.01,37.59 0 bottom
JP1060  [1X01_SMD_1.27X0.635MM_NO_SILK]  56.01,36.32 0 bottom
JP1061  [1X01_SMD_1.27X0.635MM_NO_SILK]  56.01,35.05 0 bottom
JP1062  [1X01_SMD_1.27X0.635MM_NO_SILK]  56.01,33.78 0 bottom
JP1063  [1X01_SMD_1.27X0.635MM_NO_SILK]  56.01,32.51 0 bottom
JP1064  [1X01_SMD_1.27X0.635MM_NO_SILK]  56.01,31.24 0 bottom
JP1065  [1X01_SMD_1.27X0.635MM_NO_SILK]  56.01,29.97 0 bottom
JP1066  [1X01_SMD_1.27X0.635MM_NO_SILK]  56.01,28.7 0 bottom
JP1067  [1X01_SMD_1.27X0.635MM_NO_SILK]  56.01,27.43 0 bottom
JP1068  [1X01_SMD_1.27X0.635MM_NO_SILK]  56.01,26.16 0 bottom
JP1069  [1X01_SMD_1.27X0.635MM_NO_SILK]  56.01,24.89 0 bottom
JP1070  [1X01_SMD_1.27X0.635MM_NO_SILK]  56.01,23.62 0 bottom
JP1071  [1X01_SMD_1.27X0.635MM_NO_SILK]  56.01,22.35 0 bottom
JP1072  [1X01_SMD_1.27X0.635MM_NO_SILK]  56.01,21.08 0 bottom
JP1073  [1X01_SMD_1.27X0.635MM_NO_SILK]  56.01,19.81 0 bottom
JP1074  [1X01_SMD_1.27X0.635MM_NO_SILK]  56.01,18.54 0 bottom
JP1075  [1X01_SMD_1.27X0.635MM_NO_SILK]  56.01,17.27 0 bottom
JP1076  [1X01_SMD_1.27X0.635MM_NO_SILK]  56.01,16 0 bottom
JP1077  [1X01_SMD_1.27X0.635MM_NO_SILK]  56.01,14.73 0 bottom
JP1078  [1X01_SMD_1.27X0.635MM_NO_SILK]  56.01,13.46 0 bottom
JP1079  [1X01_SMD_1.27X0.635MM_NO_SILK]  56.01,12.19 0 bottom
JP1080  [1X01_SMD_1.27X0.635MM_NO_SILK]  56.01,10.92 0 bottom
JP1081  [1X01_SMD_1.27X0.635MM_NO_SILK]  57.78,85.85 0 bottom
JP1082  [1X01_SMD_1.27X0.635MM_NO_SILK]  57.78,84.58 0 bottom
JP1083  [1X01_SMD_1.27X0.635MM_NO_SILK]  57.78,83.31 0 bottom
JP1084  [1X01_SMD_1.27X0.635MM_NO_SILK]  57.78,82.04 0 bottom
JP1085  [1X01_SMD_1.27X0.635MM_NO_SILK]  57.78,80.77 0 bottom
JP1086  [1X01_SMD_1.27X0.635MM_NO_SILK]  57.78,79.5 0 bottom
JP1087  [1X01_SMD_1.27X0.635MM_NO_SILK]  57.78,78.23 0 bottom
JP1088  [1X01_SMD_1.27X0.635MM_NO_SILK]  57.78,76.96 0 bottom
JP1089  [1X01_SMD_1.27X0.635MM_NO_SILK]  57.78,75.69 0 bottom
JP1090  [1X01_SMD_1.27X0.635MM_NO_SILK]  57.78,74.42 0 bottom
JP1091  [1X01_SMD_1.27X0.635MM_NO_SILK]  57.78,73.15 0 bottom
JP1092  [1X01_SMD_1.27X0.635MM_NO_SILK]  57.78,71.88 0 bottom
JP1093  [1X01_SMD_1.27X0.635MM_NO_SILK]  57.78,70.61 0 bottom
JP1094  [1X01_SMD_1.27X0.635MM_NO_SILK]  57.78,69.34 0 bottom
JP1095  [1X01_SMD_1.27X0.635MM_NO_SILK]  57.78,68.07 0 bottom
JP1096  [1X01_SMD_1.27X0.635MM_NO_SILK]  57.78,66.8 0 bottom
JP1097  [1X01_SMD_1.27X0.635MM_NO_SILK]  57.78,65.53 0 bottom
JP1098  [1X01_SMD_1.27X0.635MM_NO_SILK]  57.78,64.26 0 bottom
JP1099  [1X01_SMD_1.27X0.635MM_NO_SILK]  57.78,62.99 0 bottom
JP1100  [1X01_SMD_1.27X0.635MM_NO_SILK]  57.78,61.72 0 bottom
JP1101  [1X01_SMD_1.27X0.635MM_NO_SILK]  57.78,60.45 0 bottom
JP1102  [1X01_SMD_1.27X0.635MM_NO_SILK]  57.78,59.18 0 bottom
JP1103  [1X01_SMD_1.27X0.635MM_NO_SILK]  57.78,57.91 0 bottom
JP1104  [1X01_SMD_1.27X0.635MM_NO_SILK]  57.78,56.64 0 bottom
JP1105  [1X01_SMD_1.27X0.635MM_NO_SILK]  57.78,55.37 0 bottom
JP1106  [1X01_SMD_1.27X0.635MM_NO_SILK]  57.78,54.1 0 bottom
JP1107  [1X01_SMD_1.27X0.635MM_NO_SILK]  57.78,52.83 0 bottom
JP1108  [1X01_SMD_1.27X0.635MM_NO_SILK]  57.78,51.56 0 bottom
JP1109  [1X01_SMD_1.27X0.635MM_NO_SILK]  57.78,50.29 0 bottom
JP1110  [1X01_SMD_1.27X0.635MM_NO_SILK]  57.78,49.02 0 bottom
JP1111  [1X01_SMD_1.27X0.635MM_NO_SILK]  57.78,47.75 0 bottom
JP1112  [1X01_SMD_1.27X0.635MM_NO_SILK]  57.78,46.48 0 bottom
JP1113  [1X01_SMD_1.27X0.635MM_NO_SILK]  57.78,45.21 0 bottom
JP1114  [1X01_SMD_1.27X0.635MM_NO_SILK]  57.78,43.94 0 bottom
JP1115  [1X01_SMD_1.27X0.635MM_NO_SILK]  57.78,42.67 0 bottom
JP1116  [1X01_SMD_1.27X0.635MM_NO_SILK]  57.78,41.4 0 bottom
JP1117  [1X01_SMD_1.27X0.635MM_NO_SILK]  57.78,40.13 0 bottom
JP1118  [1X01_SMD_1.27X0.635MM_NO_SILK]  57.78,38.86 0 bottom
JP1119  [1X01_SMD_1.27X0.635MM_NO_SILK]  57.78,23.62 0 bottom
JP1120  [1X01_SMD_1.27X0.635MM_NO_SILK]  57.78,22.35 0 bottom
JP1121  [1X01_SMD_1.27X0.635MM_NO_SILK]  57.78,21.08 0 bottom
JP1122  [1X01_SMD_1.27X0.635MM_NO_SILK]  57.78,19.81 0 bottom
JP1123  [1X01_SMD_1.27X0.635MM_NO_SILK]  57.78,18.54 0 bottom
JP1124  [1X01_SMD_1.27X0.635MM_NO_SILK]  57.78,17.27 0 bottom
JP1125  [1X01_SMD_1.27X0.635MM_NO_SILK]  57.78,16 0 bottom
JP1126  [1X01_SMD_1.27X0.635MM_NO_SILK]  57.78,14.73 0 bottom
JP1127  [1X01_SMD_1.27X0.635MM_NO_SILK]  57.78,13.46 0 bottom
JP1128  [1X01_SMD_1.27X0.635MM_NO_SILK]  57.78,12.19 0 bottom
JP1129  [1X01_SMD_1.27X0.635MM_NO_SILK]  57.78,10.92 0 bottom
JP1130  [1X01_SMD_1.27X0.635MM_NO_SILK]  57.78,24.89 180 bottom
JP1131  [1X01_SMD_1.27X0.635MM_NO_SILK]  57.78,26.16 180 bottom
JP1132  [1X01_SMD_1.27X0.635MM_NO_SILK]  57.78,27.43 180 bottom
JP1133  [1X01_SMD_1.27X0.635MM_NO_SILK]  57.78,28.7 180 bottom
JP1134  [1X01_SMD_1.27X0.635MM_NO_SILK]  57.78,29.97 180 bottom
JP1135  [1X01_SMD_1.27X0.635MM_NO_SILK]  57.78,31.24 180 bottom
JP1136  [1X01_SMD_1.27X0.635MM_NO_SILK]  57.78,32.51 180 bottom
JP1137  [1X01_SMD_1.27X0.635MM_NO_SILK]  57.78,33.78 180 bottom
JP1138  [1X01_SMD_1.27X0.635MM_NO_SILK]  57.78,35.05 180 bottom
JP1139  [1X01_SMD_1.27X0.635MM_NO_SILK]  57.78,36.32 180 bottom
JP1140  [1X01_SMD_1.27X0.635MM_NO_SILK]  57.78,37.59 180 bottom
JP1141  [1X01_SMD_1.27X0.635MM_NO_SILK]  16.38,94.49 270 bottom
JP1142  [1X01_SMD_1.27X0.635MM_NO_SILK]  17.65,94.49 270 bottom
JP1143  [1X01_SMD_1.27X0.635MM_NO_SILK]  18.92,94.49 270 bottom
JP1144  [1X01_SMD_1.27X0.635MM_NO_SILK]  20.19,94.49 270 bottom
JP1145  [1X01_SMD_1.27X0.635MM_NO_SILK]  21.46,94.49 270 bottom
JP1146  [1X01_SMD_1.27X0.635MM_NO_SILK]  22.73,94.49 270 bottom
JP1147  [1X01_SMD_1.27X0.635MM_NO_SILK]  24,94.49 270 bottom
JP1148  [1X01_SMD_1.27X0.635MM_NO_SILK]  25.27,94.49 270 bottom
JP1149  [1X01_SMD_1.27X0.635MM_NO_SILK]  26.54,94.49 270 bottom
JP1150  [1X01_SMD_1.27X0.635MM_NO_SILK]  27.81,94.49 270 bottom
JP1151  [1X01_SMD_1.27X0.635MM_NO_SILK]  16.38,92.58 270 bottom
JP1152  [1X01_SMD_1.27X0.635MM_NO_SILK]  17.65,92.58 270 bottom
JP1153  [1X01_SMD_1.27X0.635MM_NO_SILK]  18.92,92.58 270 bottom
JP1154  [1X01_SMD_1.27X0.635MM_NO_SILK]  20.19,92.58 270 bottom
JP1155  [1X01_SMD_1.27X0.635MM_NO_SILK]  21.46,92.58 270 bottom
JP1156  [1X01_SMD_1.27X0.635MM_NO_SILK]  22.73,92.58 270 bottom
JP1157  [1X01_SMD_1.27X0.635MM_NO_SILK]  24,92.58 270 bottom
JP1158  [1X01_SMD_1.27X0.635MM_NO_SILK]  25.27,92.58 270 bottom
JP1159  [1X01_SMD_1.27X0.635MM_NO_SILK]  26.54,92.58 270 bottom
JP1160  [1X01_SMD_1.27X0.635MM_NO_SILK]  27.81,92.58 270 bottom
JP1161  [1X01_SMD_1.27X0.635MM_NO_SILK]  36.7,94.49 270 bottom
JP1162  [1X01_SMD_1.27X0.635MM_NO_SILK]  37.97,94.49 270 bottom
JP1163  [1X01_SMD_1.27X0.635MM_NO_SILK]  39.24,94.49 270 bottom
JP1164  [1X01_SMD_1.27X0.635MM_NO_SILK]  40.51,94.49 270 bottom
JP1165  [1X01_SMD_1.27X0.635MM_NO_SILK]  41.78,94.49 270 bottom
JP1166  [1X01_SMD_1.27X0.635MM_NO_SILK]  43.05,94.49 270 bottom
JP1167  [1X01_SMD_1.27X0.635MM_NO_SILK]  44.32,94.49 270 bottom
JP1168  [1X01_SMD_1.27X0.635MM_NO_SILK]  45.59,94.49 270 bottom
JP1169  [1X01_SMD_1.27X0.635MM_NO_SILK]  46.86,94.49 270 bottom
JP1170  [1X01_SMD_1.27X0.635MM_NO_SILK]  48.13,94.49 270 bottom
JP1171  [1X01_SMD_1.27X0.635MM_NO_SILK]  36.7,92.58 270 bottom
JP1172  [1X01_SMD_1.27X0.635MM_NO_SILK]  37.97,92.58 270 bottom
JP1173  [1X01_SMD_1.27X0.635MM_NO_SILK]  39.24,92.58 270 bottom
JP1174  [1X01_SMD_1.27X0.635MM_NO_SILK]  40.51,92.58 270 bottom
JP1175  [1X01_SMD_1.27X0.635MM_NO_SILK]  41.78,92.58 270 bottom
JP1176  [1X01_SMD_1.27X0.635MM_NO_SILK]  43.05,92.58 270 bottom
JP1177  [1X01_SMD_1.27X0.635MM_NO_SILK]  44.32,92.58 270 bottom
JP1178  [1X01_SMD_1.27X0.635MM_NO_SILK]  45.59,92.58 270 bottom
JP1179  [1X01_SMD_1.27X0.635MM_NO_SILK]  46.86,92.58 270 bottom
JP1180  [1X01_SMD_1.27X0.635MM_NO_SILK]  48.13,92.58 270 bottom
JP1181  [1X01_SMD_1.27X0.635MM_NO_SILK]  16.38,4.32 270 bottom
JP1182  [1X01_SMD_1.27X0.635MM_NO_SILK]  17.65,4.32 270 bottom
JP1183  [1X01_SMD_1.27X0.635MM_NO_SILK]  18.92,4.32 270 bottom
JP1184  [1X01_SMD_1.27X0.635MM_NO_SILK]  20.19,4.32 270 bottom
JP1185  [1X01_SMD_1.27X0.635MM_NO_SILK]  21.46,4.32 270 bottom
JP1186  [1X01_SMD_1.27X0.635MM_NO_SILK]  22.73,4.32 270 bottom
JP1187  [1X01_SMD_1.27X0.635MM_NO_SILK]  24,4.32 270 bottom
JP1188  [1X01_SMD_1.27X0.635MM_NO_SILK]  25.27,4.32 270 bottom
JP1189  [1X01_SMD_1.27X0.635MM_NO_SILK]  26.54,4.32 270 bottom
JP1190  [1X01_SMD_1.27X0.635MM_NO_SILK]  27.81,4.32 270 bottom
JP1191  [1X01_SMD_1.27X0.635MM_NO_SILK]  36.7,4.32 270 bottom
JP1192  [1X01_SMD_1.27X0.635MM_NO_SILK]  37.97,4.32 270 bottom
JP1193  [1X01_SMD_1.27X0.635MM_NO_SILK]  39.24,4.32 270 bottom
JP1194  [1X01_SMD_1.27X0.635MM_NO_SILK]  40.51,4.32 270 bottom
JP1195  [1X01_SMD_1.27X0.635MM_NO_SILK]  41.78,4.32 270 bottom
JP1196  [1X01_SMD_1.27X0.635MM_NO_SILK]  43.05,4.32 270 bottom
JP1197  [1X01_SMD_1.27X0.635MM_NO_SILK]  44.32,4.32 270 bottom
JP1198  [1X01_SMD_1.27X0.635MM_NO_SILK]  45.59,4.32 270 bottom
JP1199  [1X01_SMD_1.27X0.635MM_NO_SILK]  46.86,4.32 270 bottom
JP1200  [1X01_SMD_1.27X0.635MM_NO_SILK]  48.13,4.32 270 bottom

## Library data of the parts
JP1-JP300 JP901-JP1200 = SparkFun-Connectors

## Nets
0_1439385713: JP1.1 JP961.P$2
0_1439385741: JP2.1 JP1141.P$2
0_1439385772: JP63.1 JP901.P$2
0_1439385798: JP10.1 JP1021.P$2
0_1439385823: JP6.1 JP1161.P$2
0_1439385849: JP68.1 JP1081.P$2
1_1439385713: JP11.1 JP962.P$2
1_1439385741: JP3.1 JP1142.P$2
1_1439385772: JP73.1 JP902.P$2
1_1439385798: JP20.1 JP1022.P$2
1_1439385823: JP7.1 JP1162.P$2
1_1439385849: JP78.1 JP1082.P$2
2_1439385713: JP21.1 JP963.P$2
2_1439385741: JP4.1 JP1143.P$2
2_1439385772: JP64.1 JP903.P$2
2_1439385798: JP30.1 JP1023.P$2
2_1439385823: JP8.1 JP1163.P$2
2_1439385849: JP67.1 JP1083.P$2
3_1439385713: JP31.1 JP964.P$2
3_1439385741: JP5.1 JP1144.P$2
3_1439385772: JP83.1 JP904.P$2
3_1439385798: JP40.1 JP1024.P$2
3_1439385823: JP9.1 JP1164.P$2
3_1439385849: JP88.1 JP1084.P$2
4_1439385713: JP41.1 JP965.P$2
4_1439385741: JP13.1 JP1145.P$2
4_1439385772: JP74.1 JP905.P$2
4_1439385798: JP50.1 JP1025.P$2
4_1439385823: JP18.1 JP1165.P$2
4_1439385849: JP77.1 JP1085.P$2
5_1439385713: JP22.1 JP966.P$2
5_1439385741: JP14.1 JP1146.P$2
5_1439385772: JP65.1 JP906.P$2
5_1439385798: JP29.1 JP1026.P$2
5_1439385823: JP19.1 JP1166.P$2
5_1439385849: JP66.1 JP1086.P$2
6_1439385713: JP51.1 JP967.P$2
6_1439385741: JP15.1 JP1147.P$2
6_1439385772: JP93.1 JP907.P$2
6_1439385798: JP60.1 JP1027.P$2
6_1439385823: JP17.1 JP1167.P$2
6_1439385849: JP98.1 JP1087.P$2
7_1439385713: JP32.1 JP968.P$2
7_1439385741: JP12.1 JP1148.P$2
7_1439385772: JP84.1 JP908.P$2
7_1439385798: JP39.1 JP1028.P$2
7_1439385823: JP16.1 JP1168.P$2
7_1439385849: JP87.1 JP1088.P$2
8_1439385713: JP61.1 JP969.P$2
8_1439385741: JP25.1 JP1149.P$2
8_1439385772: JP75.1 JP909.P$2
8_1439385798: JP70.1 JP1029.P$2
8_1439385823: JP28.1 JP1169.P$2
8_1439385849: JP76.1 JP1089.P$2
9_1439385713: JP42.1 JP970.P$2
9_1439385741: JP24.1 JP1150.P$2
9_1439385772: JP103.1 JP910.P$2
9_1439385798: JP49.1 JP1030.P$2
9_1439385823: JP27.1 JP1170.P$2
9_1439385849: JP108.1 JP1090.P$2
10_1439385713: JP71.1 JP971.P$2
10_1439385741: JP23.1 JP1151.P$2
10_1439385772: JP94.1 JP911.P$2
10_1439385798: JP80.1 JP1031.P$2
10_1439385823: JP26.1 JP1171.P$2
10_1439385849: JP97.1 JP1091.P$2
11_1439385713: JP52.1 JP972.P$2
11_1439385741: JP33.1 JP1152.P$2
11_1439385772: JP113.1 JP912.P$2
11_1439385798: JP59.1 JP1032.P$2
11_1439385823: JP36.1 JP1172.P$2
11_1439385849: JP118.1 JP1092.P$2
12_1439385713: JP81.1 JP973.P$2
12_1439385741: JP34.1 JP1153.P$2
12_1439385772: JP104.1 JP913.P$2
12_1439385798: JP90.1 JP1033.P$2
12_1439385823: JP37.1 JP1173.P$2
12_1439385849: JP107.1 JP1093.P$2
13_1439385713: JP62.1 JP974.P$2
13_1439385741: JP35.1 JP1154.P$2
13_1439385772: JP85.1 JP914.P$2
13_1439385798: JP69.1 JP1034.P$2
13_1439385823: JP38.1 JP1174.P$2
13_1439385849: JP86.1 JP1094.P$2
14_1439385713: JP91.1 JP975.P$2
14_1439385741: JP43.1 JP1155.P$2
14_1439385772: JP123.1 JP915.P$2
14_1439385798: JP100.1 JP1035.P$2
14_1439385823: JP48.1 JP1175.P$2
14_1439385849: JP128.1 JP1095.P$2
15_1439385713: JP72.1 JP976.P$2
15_1439385741: JP44.1 JP1156.P$2
15_1439385772: JP114.1 JP916.P$2
15_1439385798: JP79.1 JP1036.P$2
15_1439385823: JP47.1 JP1176.P$2
15_1439385849: JP117.1 JP1096.P$2
16_1439385713: JP101.1 JP977.P$2
16_1439385741: JP45.1 JP1157.P$2
16_1439385772: JP133.1 JP917.P$2
16_1439385798: JP110.1 JP1037.P$2
16_1439385823: JP46.1 JP1177.P$2
16_1439385849: JP138.1 JP1097.P$2
17_1439385713: JP82.1 JP978.P$2
17_1439385741: JP54.1 JP1158.P$2
17_1439385772: JP124.1 JP918.P$2
17_1439385798: JP89.1 JP1038.P$2
17_1439385823: JP58.1 JP1178.P$2
17_1439385849: JP127.1 JP1098.P$2
18_1439385713: JP111.1 JP979.P$2
18_1439385741: JP55.1 JP1159.P$2
18_1439385772: JP143.1 JP919.P$2
18_1439385798: JP120.1 JP1039.P$2
18_1439385823: JP57.1 JP1179.P$2
18_1439385849: JP96.1 JP1099.P$2
19_1439385713: JP92.1 JP980.P$2
19_1439385741: JP53.1 JP1160.P$2
19_1439385772: JP134.1 JP920.P$2
19_1439385798: JP99.1 JP1040.P$2
19_1439385823: JP56.1 JP1180.P$2
19_1439385849: JP148.1 JP1100.P$2
20_1439385713: JP121.1 JP981.P$2
20_1439385741: JP294.1 JP1181.P$2
20_1439385772: JP153.1 JP921.P$2
20_1439385798: JP130.1 JP1041.P$2
20_1439385823: JP296.1 JP1191.P$2
20_1439385849: JP137.1 JP1101.P$2
21_1439385713: JP102.1 JP982.P$2
21_1439385741: JP284.1 JP1182.P$2
21_1439385772: JP144.1 JP922.P$2
21_1439385798: JP109.1 JP1042.P$2
21_1439385823: JP297.1 JP1192.P$2
21_1439385849: JP158.1 JP1102.P$2
22_1439385713: JP131.1 JP983.P$2
22_1439385741: JP295.1 JP1183.P$2
22_1439385772: JP163.1 JP923.P$2
22_1439385798: JP140.1 JP1043.P$2
22_1439385823: JP287.1 JP1193.P$2
22_1439385849: JP147.1 JP1103.P$2
23_1439385713: JP112.1 JP984.P$2
23_1439385741: JP285.1 JP1184.P$2
23_1439385772: JP154.1 JP924.P$2
23_1439385798: JP119.1 JP1044.P$2
23_1439385823: JP286.1 JP1194.P$2
23_1439385849: JP168.1 JP1104.P$2
24_1439385713: JP141.1 JP985.P$2
24_1439385741: JP273.1 JP1185.P$2
24_1439385772: JP173.1 JP925.P$2
24_1439385798: JP150.1 JP1045.P$2
24_1439385823: JP278.1 JP1195.P$2
24_1439385849: JP157.1 JP1105.P$2
25_1439385713: JP122.1 JP986.P$2
25_1439385741: JP274.1 JP1186.P$2
25_1439385772: JP164.1 JP926.P$2
25_1439385798: JP129.1 JP1046.P$2
25_1439385823: JP277.1 JP1196.P$2
25_1439385849: JP178.1 JP1106.P$2
26_1439385713: JP151.1 JP987.P$2
26_1439385741: JP275.1 JP1187.P$2
26_1439385772: JP183.1 JP927.P$2
26_1439385798: JP160.1 JP1047.P$2
26_1439385823: JP276.1 JP1197.P$2
26_1439385849: JP167.1 JP1107.P$2
27_1439385713: JP132.1 JP988.P$2
27_1439385741: JP264.1 JP1188.P$2
27_1439385772: JP174.1 JP928.P$2
27_1439385798: JP139.1 JP1048.P$2
27_1439385823: JP268.1 JP1198.P$2
27_1439385849: JP188.1 JP1108.P$2
28_1439385713: JP161.1 JP989.P$2
28_1439385741: JP265.1 JP1189.P$2
28_1439385772: JP193.1 JP929.P$2
28_1439385798: JP170.1 JP1049.P$2
28_1439385823: JP267.1 JP1199.P$2
28_1439385849: JP177.1 JP1109.P$2
29_1439385713: JP142.1 JP990.P$2
29_1439385741: JP263.1 JP1190.P$2
29_1439385772: JP184.1 JP930.P$2
29_1439385798: JP149.1 JP1050.P$2
29_1439385823: JP258.1 JP1200.P$2
29_1439385849: JP198.1 JP1110.P$2
30_1439385713: JP171.1 JP991.P$2
30_1439385772: JP203.1 JP931.P$2
30_1439385798: JP180.1 JP1051.P$2
30_1439385849: JP187.1 JP1111.P$2
31_1439385713: JP152.1 JP992.P$2
31_1439385772: JP194.1 JP932.P$2
31_1439385798: JP159.1 JP1052.P$2
31_1439385849: JP208.1 JP1112.P$2
32_1439385713: JP181.1 JP993.P$2
32_1439385772: JP213.1 JP933.P$2
32_1439385798: JP190.1 JP1053.P$2
32_1439385849: JP197.1 JP1113.P$2
33_1439385713: JP162.1 JP994.P$2
33_1439385772: JP204.1 JP934.P$2
33_1439385798: JP169.1 JP1054.P$2
33_1439385849: JP218.1 JP1114.P$2
34_1439385713: JP191.1 JP995.P$2
34_1439385772: JP223.1 JP935.P$2
34_1439385798: JP200.1 JP1055.P$2
34_1439385849: JP207.1 JP1115.P$2
35_1439385713: JP172.1 JP996.P$2
35_1439385772: JP214.1 JP936.P$2
35_1439385798: JP179.1 JP1056.P$2
35_1439385849: JP228.1 JP1116.P$2
36_1439385713: JP201.1 JP997.P$2
36_1439385772: JP233.1 JP937.P$2
36_1439385798: JP210.1 JP1057.P$2
36_1439385849: JP217.1 JP1117.P$2
37_1439385713: JP182.1 JP998.P$2
37_1439385772: JP224.1 JP938.P$2
37_1439385798: JP189.1 JP1058.P$2
37_1439385849: JP238.1 JP1118.P$2
38_1439385713: JP211.1 JP999.P$2
38_1439385772: JP243.1 JP939.P$2
38_1439385798: JP220.1 JP1059.P$2
38_1439385849: JP227.1 JP1119.P$2
39_1439385713: JP192.1 JP1000.P$2
39_1439385772: JP234.1 JP940.P$2
39_1439385798: JP199.1 JP1060.P$2
39_1439385849: JP248.1 JP1120.P$2
40_1439385713: JP221.1 JP1001.P$2
40_1439385772: JP253.1 JP941.P$2
40_1439385798: JP230.1 JP1061.P$2
40_1439385849: JP237.1 JP1121.P$2
41_1439385713: JP202.1 JP1002.P$2
41_1439385772: JP244.1 JP942.P$2
41_1439385798: JP209.1 JP1062.P$2
41_1439385849: JP247.1 JP1122.P$2
42_1439385713: JP231.1 JP1003.P$2
42_1439385772: JP215.1 JP943.P$2
42_1439385798: JP240.1 JP1063.P$2
42_1439385849: JP216.1 JP1123.P$2
43_1439385713: JP212.1 JP1004.P$2
43_1439385772: JP254.1 JP944.P$2
43_1439385798: JP219.1 JP1064.P$2
43_1439385849: JP257.1 JP1124.P$2
44_1439385713: JP241.1 JP1005.P$2
44_1439385772: JP225.1 JP945.P$2
44_1439385798: JP250.1 JP1065.P$2
44_1439385849: JP226.1 JP1125.P$2
45_1439385713: JP222.1 JP1006.P$2
45_1439385772: JP235.1 JP946.P$2
45_1439385798: JP229.1 JP1066.P$2
45_1439385849: JP236.1 JP1126.P$2
46_1439385713: JP251.1 JP1007.P$2
46_1439385772: JP245.1 JP947.P$2
46_1439385798: JP260.1 JP1067.P$2
46_1439385849: JP246.1 JP1127.P$2
47_1439385713: JP232.1 JP1008.P$2
47_1439385772: JP255.1 JP948.P$2
47_1439385798: JP239.1 JP1068.P$2
47_1439385849: JP256.1 JP1128.P$2
48_1439385713: JP261.1 JP1009.P$2
48_1439385772: JP205.1 JP949.P$2
48_1439385798: JP270.1 JP1069.P$2
48_1439385849: JP266.1 JP1129.P$2
49_1439385713: JP242.1 JP1010.P$2
49_1439385772: JP195.1 JP950.P$2
49_1439385798: JP249.1 JP1070.P$2
49_1439385849: JP206.1 JP1130.P$2
50_1439385713: JP271.1 JP1011.P$2
50_1439385772: JP185.1 JP951.P$2
50_1439385798: JP280.1 JP1071.P$2
50_1439385849: JP196.1 JP1131.P$2
51_1439385713: JP252.1 JP1012.P$2
51_1439385772: JP175.1 JP952.P$2
51_1439385798: JP259.1 JP1072.P$2
51_1439385849: JP186.1 JP1132.P$2
52_1439385713: JP281.1 JP1013.P$2
52_1439385772: JP165.1 JP953.P$2
52_1439385798: JP290.1 JP1073.P$2
52_1439385849: JP176.1 JP1133.P$2
53_1439385713: JP262.1 JP1014.P$2
53_1439385772: JP155.1 JP954.P$2
53_1439385798: JP269.1 JP1074.P$2
53_1439385849: JP166.1 JP1134.P$2
54_1439385713: JP291.1 JP1015.P$2
54_1439385772: JP145.1 JP955.P$2
54_1439385798: JP300.1 JP1075.P$2
54_1439385849: JP156.1 JP1135.P$2
55_1439385713: JP272.1 JP1016.P$2
55_1439385772: JP135.1 JP956.P$2
55_1439385798: JP279.1 JP1076.P$2
55_1439385849: JP146.1 JP1136.P$2
56_1439385713: JP282.1 JP1017.P$2
56_1439385772: JP125.1 JP957.P$2
56_1439385798: JP289.1 JP1077.P$2
56_1439385849: JP136.1 JP1137.P$2
57_1439385713: JP292.1 JP1018.P$2
57_1439385772: JP115.1 JP958.P$2
57_1439385798: JP299.1 JP1078.P$2
57_1439385849: JP126.1 JP1138.P$2
58_1439385713: JP293.1 JP1019.P$2
58_1439385772: JP105.1 JP959.P$2
58_1439385798: JP298.1 JP1079.P$2
58_1439385849: JP116.1 JP1139.P$2
59_1439385713: JP283.1 JP1020.P$2
59_1439385772: JP95.1 JP960.P$2
59_1439385798: JP288.1 JP1080.P$2
59_1439385849: JP106.1 JP1140.P$2

## Tracks (layer width: path | path; a pad name or v marks a point on that pad's centre or on a via)
0_1439385713
  Bottom 0.203: JP961.P$2 8.53,85.75 16.46,85.75 17.07,85.14 JP1.1
0_1439385741
  Bottom 0.203: JP1141.P$2 16.26,94.49 16.26,93.88 15.65,93.27 15.65,89.2 19.71,85.14 JP2.1
0_1439385772  (via drill 0.3)
  Top 0.203: v6.91,86.77 6.91,85.75 16.46,76.2 20.32,76.2 20.93,75.59 20.93,71.12 22.15,69.9 JP63.1
  Bottom 0.203: v6.91,86.77 6.91,85.95 JP901.P$2
0_1439385798
  Bottom 0.203: JP1021.P$2 55.88,85.75 48.36,85.75 47.75,85.14 JP10.1
0_1439385823  (via drill 0.3)
  Top 0.203: v37.19,90.42 v35.97,91.64
  Bottom 0.203: v35.97,91.64 35.97,93.27 36.58,93.88 36.58,94.49 JP1161.P$2 | v37.19,90.42 37.19,85.34 37.39,85.14 JP6.1
0_1439385849
  Bottom 0.203: JP1081.P$2 57.71,85.95 57.71,86.36 47.35,96.72 36.78,96.72 34.95,94.89 34.95,72.95 36.78,71.12 41.25,71.12 42.47,69.9 JP68.1
1_1439385713
  Bottom 0.203: JP962.P$2 8.53,84.53 15.24,84.53 17.07,82.7 JP11.1
1_1439385741
  Bottom 0.203: JP1142.P$2 17.68,94.49 17.68,94.08 18.29,93.47 18.29,89 22.15,85.14 JP3.1
1_1439385772  (via drill 0.3)
  Route2 0.203: v5.49,84.53 5.49,83.31 16.05,72.75 16.05,71.93 17.07,70.92 17.68,70.92 18.49,70.1 18.49,69.49 19.51,68.48 21.13,68.48 22.15,67.46 JP73.1
  Bottom 0.203: v5.49,84.53 6.71,84.53 JP902.P$2
1_1439385798
  Bottom 0.203: JP1022.P$2 55.88,84.53 49.58,84.53 47.75,82.7 JP20.1
1_1439385823
  Bottom 0.203: JP1162.P$2 38,94.49 38,94.08 38.61,93.47 38.61,86.36 39.83,85.14 JP7.1
1_1439385849  (via drill 0.3)
  Route15 0.203: v58.93,81.89 49.78,72.75 49.78,72.34 48.36,70.92 47.14,70.92 46.33,70.1 46.33,69.49 45.31,68.48 43.69,68.48 42.67,67.46 JP78.1
  Bottom 0.203: v58.93,81.89 59.54,82.5 59.54,83.52 58.52,84.53 57.91,84.53 JP1082.P$2
2_1439385713
  Bottom 0.203: JP963.P$2 13.82,83.31 17.07,80.06 JP21.1
2_1439385741  (via drill 0.3)
  Top 0.203: v19.51,95.5 19.51,90.63 24.59,85.55 24.59,85.14 JP4.1
  Bottom 0.203: v19.51,95.5 19.1,95.1 19.1,94.49 JP1143.P$2
2_1439385772  (via drill 0.3)
  Route2 0.203: v5.49,85.34 7.72,85.34 17.07,76 17.68,76 18.49,75.18 18.49,74.57 19.51,73.56 20.12,73.56 21.13,72.54 21.13,71.93 22.15,70.92 23.57,70.92 24.59,69.9 JP64.1
  Bottom 0.203: JP903.P$2 5.89,83.31 4.88,84.33 4.88,84.73 v5.49,85.34
2_1439385798
  Bottom 0.203: JP1023.P$2 51,83.31 47.75,80.06 JP30.1
2_1439385823  (via drill 0.3)
  Top 0.203: v39.83,95.5 39.83,88.8 42.47,86.16 42.47,85.14 JP8.1
  Bottom 0.203: v39.83,95.5 39.42,95.1 39.42,94.49 JP1163.P$2
2_1439385849  (via drill 0.3)
  Route15 0.203: v58.93,83.31 54.46,78.84 54.25,78.84 49.38,73.97 49.38,72.54 48.16,71.32 41.45,71.32 40.03,69.9 JP67.1
  Bottom 0.203: v58.93,83.31 JP1083.P$2
3_1439385713
  Bottom 0.203: JP964.P$2 8.53,81.89 13.21,81.89 17.07,78.03 17.07,77.62 JP31.1
3_1439385741  (via drill 0.3)
  Top 0.203: v20.32,95.71 20.32,93.67 23.57,90.42 23.57,89.61 27.23,85.95 27.23,85.14 JP5.1
  Bottom 0.203: v20.32,95.71 20.32,94.49 JP1144.P$2
3_1439385772  (via drill 0.3)
  Route2 0.203: v5.49,82.09 9.14,78.44 9.14,73.76 17.07,65.84 21.13,65.84 22.15,64.82 JP83.1
  Bottom 0.203: v5.49,82.09 6.71,82.09 JP904.P$2
3_1439385798
  Bottom 0.203: JP1024.P$2 55.88,81.89 52.02,81.89 47.75,77.62 JP40.1
3_1439385823  (via drill 0.3)
  Top 0.203: v40.64,95.71 40.64,89.41 44.91,85.14 JP9.1
  Bottom 0.203: v40.64,95.71 40.64,94.49 JP1164.P$2
3_1439385849  (via drill 0.3)
  Route15 0.203: v58.93,81.08 58.93,80.26 49.38,70.71 49.38,67.46 47.75,65.84 43.69,65.84 42.67,64.82 JP88.1
  Bottom 0.203: v58.93,81.08 58.52,81.48 58.32,81.48 57.91,81.89 JP1084.P$2
4_1439385713  (via drill 0.3)
  Top 0.203: v9.75,80.67 11.38,80.67 17.07,74.98 JP41.1
  Bottom 0.203: v9.75,80.67 8.53,80.67 JP965.P$2
4_1439385741  (via drill 0.3)
  Route2 0.203: v21.34,95.71 21.34,91.64 20.73,91.03 20.73,85.75 21.13,85.34 21.13,83.72 22.15,82.7 JP13.1
  Bottom 0.203: v21.34,95.71 21.34,94.49 JP1145.P$2
4_1439385772  (via drill 0.3)
  Route15 0.203: v5.49,80.87 5.49,79.86 16.87,68.48 23.57,68.48 24.59,67.46 JP74.1
  Bottom 0.203: v5.49,80.87 6.71,80.87 JP905.P$2
4_1439385798  (via drill 0.3)
  Top 0.203: v54.86,80.67 53.85,80.67 48.16,74.98 47.75,74.98 JP50.1
  Bottom 0.203: v54.86,80.67 55.88,80.67 JP1025.P$2
4_1439385823  (via drill 0.3)
  Route15 0.203: v41.86,95.71 41.86,85.95 41.45,85.55 41.45,83.72 42.47,82.7 JP18.1
  Bottom 0.203: v41.86,95.71 41.86,94.49 JP1165.P$2
4_1439385849  (via drill 0.3)
  Route2 0.203: v58.93,74.98 56.9,74.98 51.61,69.7 49.17,69.7 47.95,68.48 41.05,68.48 40.03,67.46 JP77.1
  Bottom 0.203: v58.93,74.98 59.54,75.59 59.54,79.65 58.52,80.67 57.91,80.67 JP1085.P$2
5_1439385713  (via drill 0.3)
  Route15 0.203: v15.44,78.84 18.49,78.84 19.51,79.86 JP22.1
  Bottom 0.203: v15.44,78.84 12.8,78.84 12.19,79.45 8.53,79.45 JP966.P$2
5_1439385741  (via drill 0.3)
  Route15 0.203: v23.16,86.16 23.16,85.75 23.57,85.34 23.57,83.72 24.59,82.7 JP14.1
  Bottom 0.203: v23.16,86.16 23.37,86.36 23.37,93.47 22.76,94.08 22.76,94.49 JP1146.P$2
5_1439385772  (via drill 0.3)
  Route15 0.203: v5.08,81.48 5.69,81.48 9.55,77.62 9.55,77.42 16.05,70.92 26.21,70.92 27.23,69.9 JP65.1
  Bottom 0.203: v5.08,81.48 4.88,81.28 4.88,80.67 5.89,79.65 6.71,79.65 JP906.P$2
5_1439385798  (via drill 0.3)
  Top 0.203: v52.02,79.65 49.78,79.65 48.16,81.28 46.33,81.28 45.11,80.06 JP29.1
  Bottom 0.203: v52.02,79.65 55.88,79.65 JP1026.P$2
5_1439385823  (via drill 0.3)
  Top 0.203: v42.88,95.71 42.88,92.05 42.47,91.64 42.47,90.83 45.72,87.58 45.72,86.36 46.33,85.75 46.33,83.92 45.11,82.7 JP19.1
  Bottom 0.203: v42.88,95.71 42.88,94.49 JP1166.P$2
5_1439385849  (via drill 0.3)
  Route2 0.203: v58.93,79.45 56.49,79.45 50.39,73.36 48.36,73.36 48.16,73.56 39.62,73.56 38.61,72.54 38.61,70.92 37.59,69.9 JP66.1
  Bottom 0.203: v58.93,79.45 57.91,79.45 JP1086.P$2
6_1439385713  (via drill 0.3)
  Top 0.203: v9.75,78.23 10.77,78.23 16.46,72.54 17.07,72.54 JP51.1
  Bottom 0.203: v9.75,78.23 JP967.P$2
6_1439385741  (via drill 0.3)
  Top 0.203: v23.98,95.71 23.98,90.22 28.65,85.55 28.65,83.92 27.43,82.7 JP15.1
  Bottom 0.203: v23.98,95.71 23.98,94.49 JP1147.P$2
6_1439385772  (via drill 0.3)
  Route15 0.203: v5.49,78.23 5.49,77.42 17.07,65.84 17.68,65.84 18.49,65.02 18.49,64.41 19.51,63.4 21.13,63.4 22.15,62.38 JP93.1
  Bottom 0.203: v5.49,78.23 JP907.P$2
6_1439385798  (via drill 0.3)
  Top 0.203: v54.46,78.23 53.85,78.23 48.16,72.54 47.75,72.54 JP60.1
  Bottom 0.203: v54.46,78.23 JP1027.P$2
6_1439385823  (via drill 0.3)